# Altium PCB Light Control.PcbDoc
Units mm, origin at the board's own origin, x right, y up, seen from the top; angles counter-clockwise.
Board outline 152.4 x 101.6 mm, 2 copper layers (Top Layer, Bottom Layer); 26 components, 34 nets, 101 pads, 44 vias.
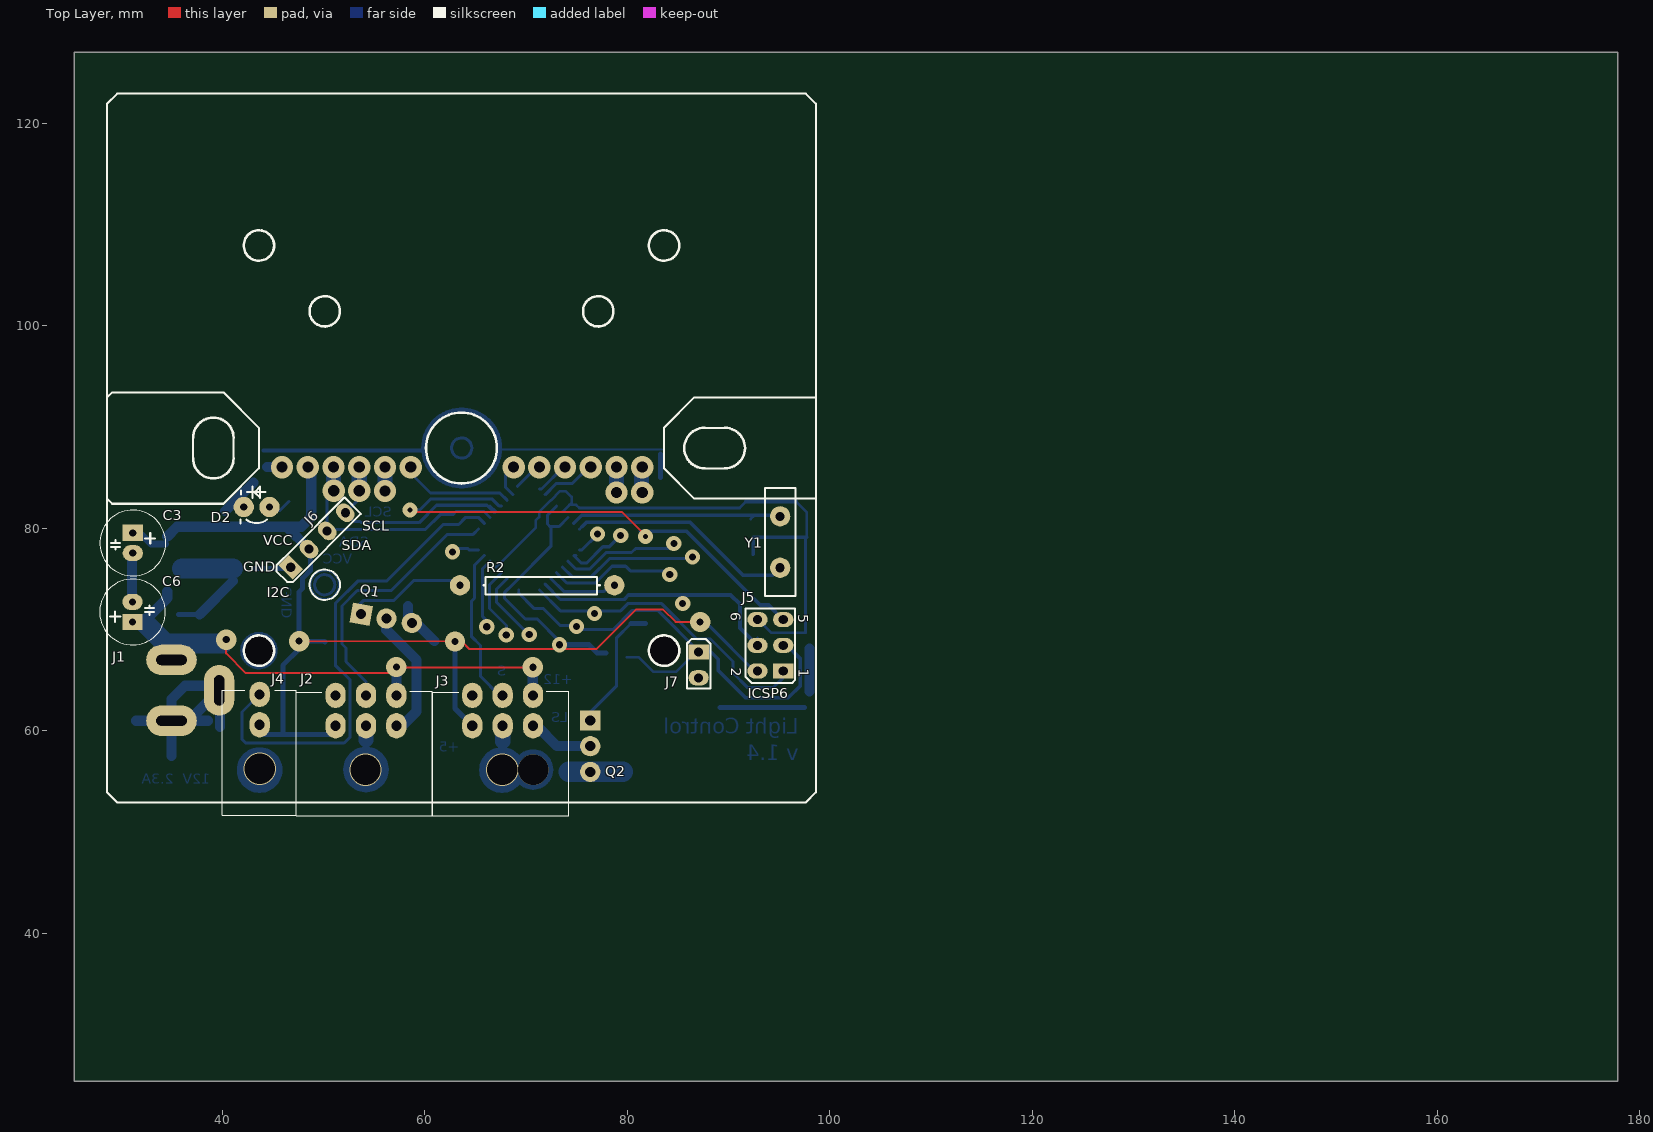
[diagram p0: Top Layer view]
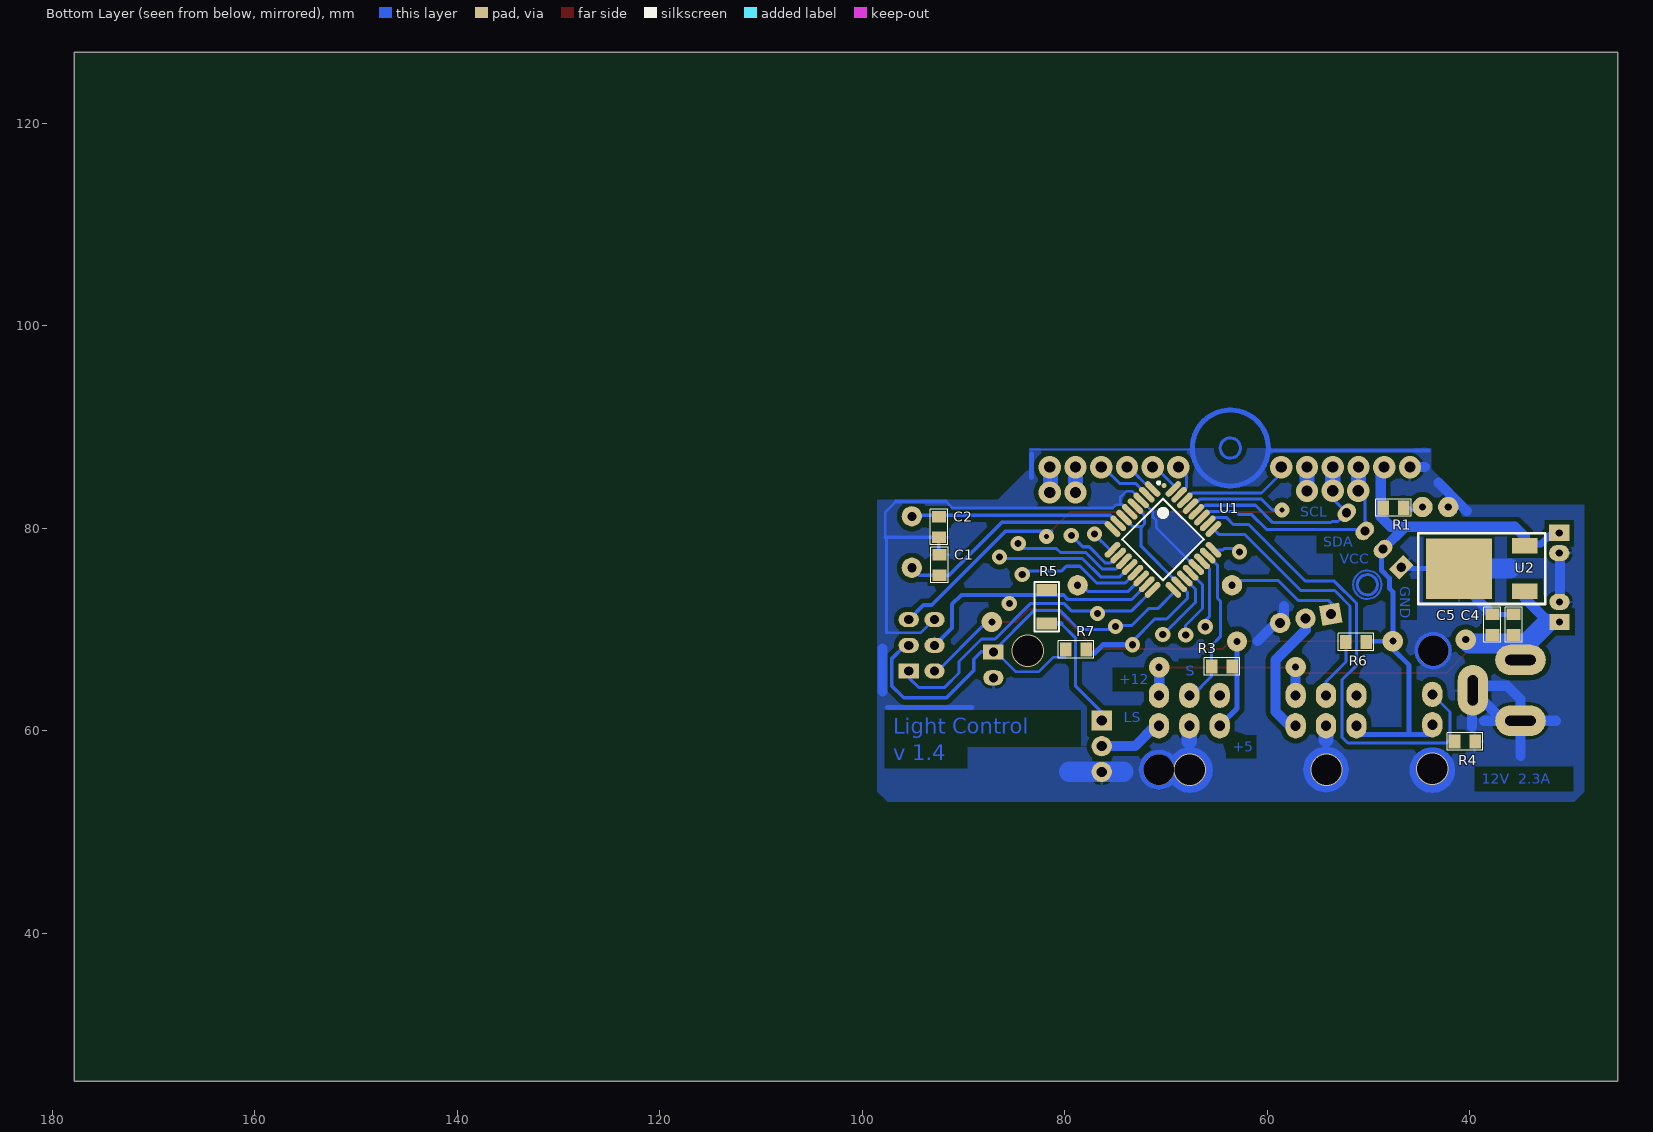
[diagram p1: Bottom Layer view, seen from below]
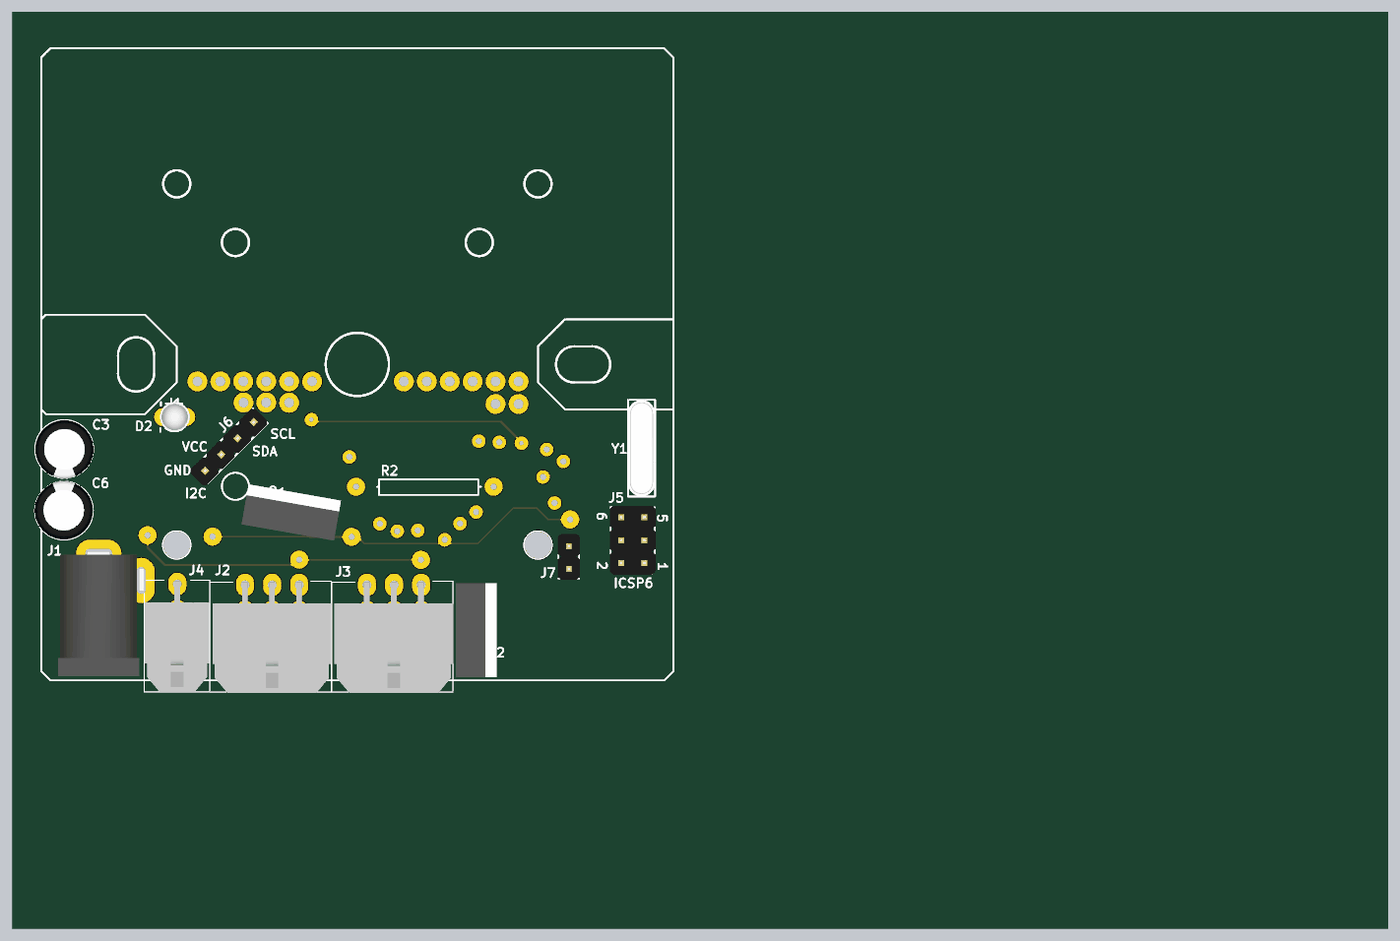
[diagram p2: 3D render of the assembled board from above, using the file's embedded part models]
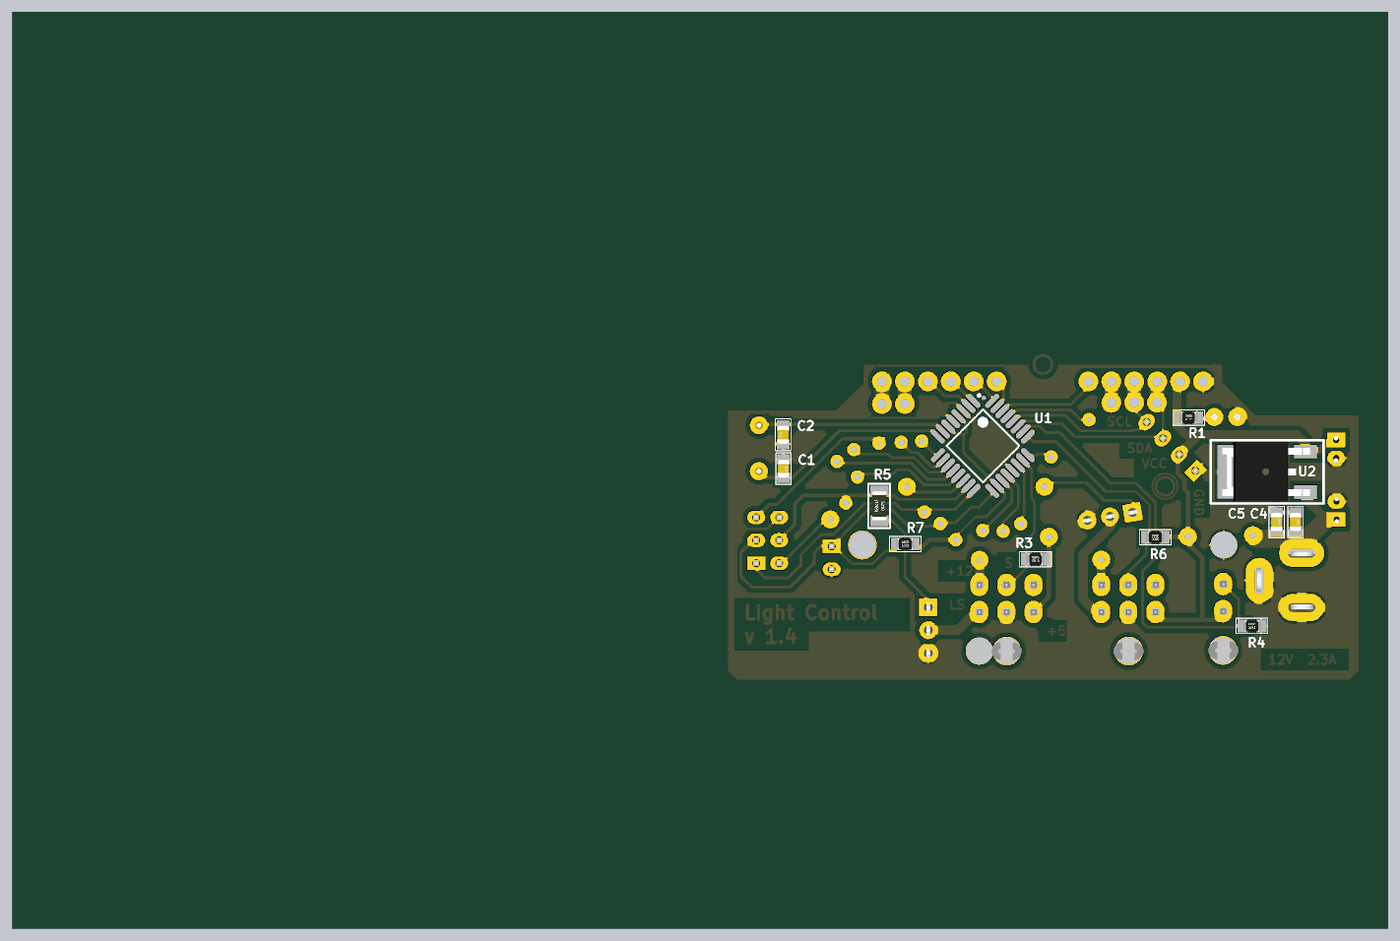
[diagram p3: 3D render of the assembled board from below, using the file's embedded part models]

## Layer stack, top to bottom
Top Solder: solder mask 0.0102, Solder Resist, Dk 3.5
Top Layer: signal copper 0.0356
Dielectric 1: dielectric 0.32, FR-4, Dk 4.8
Bottom Layer: signal copper 0.0356
Bottom Solder: solder mask 0.0102, Solder Resist, Dk 3.5

## Board outline
25.4,25.4 177.8,25.4 177.8,127 25.4,127

## Design rules (kind name [scope] priority, off if disabled: settings)
Clearance PolgonClearence [InPolygon] p1: gap=0.5
Clearance [All] p2: gap=0.2
PlaneClearance [All] p1: clearance=2
PlaneConnect [All] p1: planeconnectstyle=Relief reliefexpansion=0.508 reliefentries=4 reliefconductorwidth=0.5 reliefairgap=1
PolygonConnect [All] p1: connectstyle=Relief reliefconductorwidth=0.254 reliefentries=4 polygonreliefangle="90 Angle" airgapwidth=0.3
RoutingVias [All] p1: holewidth=0.711 width=1.27 viastyle="Through Hole" minholewidth=0.711 minwidth=1.27 maxholewidth=0.711 maxwidth=1.27
SolderMaskExpansion [All] p1: expansion=0.102
Width [All] p1: maxlimit=2 minlimit=0.2 preferedwidth=0.5
27 further rules are at their usual default settings.

## Components (designator, comment, footprint, x,y, rotation, side; value= is the part's Value field where it differs from the comment)
C1 "22pF" "SMD 0805 (2012)" 92.4,77.4 r270 bottom
C2 "22pF" "SMD 0805 (2012)" 92.4,79.1 r90 bottom
C3 "220mF 16v" "Cap E p2mm D6.5xH11" 31.175,79.55 r270 top
C4 "0.01uF" "SMD 0805 (2012)" 35.7,71.5 r270 bottom
C5 "0.1uF" "SMD 0805 (2012)" 37.8,71.5 r270 bottom
C6 "25v 220mF" "Cap E p2mm D6.5xH11" 31.146,70.734 r90 top
D2 "FYL-3014GD" "LED Round 3mm Green" 44.675,82.1 r180 top
J1 "DC In 12V" "DC Connector" 35,67 r270 top
J2 "Connector" "Molex Micro-Fit 3.0 - 6 pin D R" 57.2,60.5 r0 top
J3 "Connector" "Molex Micro-Fit 3.0 - 6 pin D R" 70.7,60.5 r0 top
J4 "Light Sensor" "Molex Micro-Fit 3.0 - 2 pin D R" 43.7,60.6 r0 top
J5 "ISP6" "LINE 2.54 x 6D (2 x 3)" 95.4,65.9 r180 top
J6 "PLS-4" "Line 2.54 X 4" 46.775,76.15 r135 top
J7 "ON/OFF Display and serial" "Line 2.54 x 2" 87.05,67.775 r0 top
Q1 "TIP122" TO220-2 53.725,71.525 r260 top
Q2 "TIP122" TO220-2 76.35,61.025 r180 top
R1 "2.2k Om" "SMD 0805 (2012)" 48.55,82 r180 bottom
R2 "1kOm" "Res 0.25w - 7p" 78.725,74.375 r180 top
R3 "10KOm" "SMD 0805 (2012)" 65.5,66.325 r180 bottom
R4 "Om" "SMD 0805 (2012)" 41.525,58.925 r180 bottom
R5 "1kOm" "SMD 1206 (3216)" 81.775,73.9 r270 bottom
R6 "10KOm" "SMD 0805 (2012)" 50.2,68.8 r0 bottom
R7 "10kOm" "SMD 0805 (2012)" 79.925,68 r180 bottom
U1 "ATmega8A-AU" 32A_M 70.3,78.9 r225 bottom
U2 "7805C" D-PAK 41.075,76.025 r180 bottom
Y1 "12 MHz" "XTAL - 2" 95.1,76.1 r90 top

## Footprints (in the part's own frame and the unit in brackets; to place one, negate y for a bottom-side part, rotate by r counter-clockwise, add the part's x,y. Pads: shape width x height; smd on the part's side, far side on the other; paste and mask are expansions set on the pad)
32A_M [mm] "Thin QFP, 32-Leads, Body 7x7mm, Pitch 0.8mm, IPC Low Density"
  oval 1.95x0.6 smd: 1(-4.25,2.8) 2(-4.25,2) 3(-4.25,1.2) 4(-4.25,0.4) 5(-4.25,-0.4) 6(-4.25,-1.2) 7(-4.25,-2) 8(-4.25,-2.8) 17(4.25,-2.8) 18(4.25,-2) 19(4.25,-1.2) 20(4.25,-0.4) 21(4.25,0.4) 22(4.25,1.2) 23(4.25,2) 24(4.25,2.8)
  oval 0.6x1.95 smd: 9(-2.8,-4.25) 10(-2,-4.25) 11(-1.2,-4.25) 12(-0.4,-4.25) 13(0.4,-4.25) 14(1.2,-4.25) 15(2,-4.25) 16(2.8,-4.25) 25(2.8,4.25) 26(2,4.25) 27(1.2,4.25) 28(0.4,4.25) 29(-0.4,4.25) 30(-1.2,4.25) 31(-2,4.25) 32(-2.8,4.25)
  silkscreen extent -4.37,-2.85 2.85,3.77, body extent -3.5,-3.5 3.5,3.5, height 1.2
"Cap E p2mm D6.5xH11" [mm] "D 6.5mm; H 11mm"
  rect 1.6x2 hole 0.7: 1(0,0)
  oval 1.6x2 hole 0.7: 2(2,0)
  silkscreen extent -2.25,-3.25 4.25,3.25, body extent -2.22,-3.22 4.27,3.28, height 11.49
D-PAK [mm]
  rect 2.54x1.5 smd: 1(6.5,-2.25) 3(6.5,2.25)
  rect 6.48x5.97 smd: 2(0,0)
  silkscreen extent -4,-3.5 8.5,3.5, body extent -2.7,-3.29 7,3.29, height 2.3
"DC Connector" [mm] "Ext Pin D: 5.5mm; Int Pin D: 2.5mm"
  oval 5x3 hole 1 slot 3 at 0 deg: GND(3,4.7)
  oval 3x5 hole 1 slot 3 at 90 deg: GND(6,0) VCC(0,0)
  body extent -0.2,-4.53 13.63,4.98, height 11
"LED Round 3mm Green" [mm]
  round 2 hole 0.7: A(0,0) K(2.54,0)
  silkscreen extent 0.25,-2.03 2.88,1.63, body extent -0.39,-1.65 2.91,1.64, height 5.51
"Line 2.54 x 2" [mm]
  rect 2x1.5 hole 0.9: 1(0,0)
  oval 2x1.5 hole 0.9: 2(0,-2.54)
  silkscreen extent -1.15,-3.57 1.15,1.28, body extent -1.25,-3.69 1.25,1.39, height 8.3
"Line 2.54 X 4" [mm]
  rect 2x1.5 hole 0.9: 1(0,0)
  oval 2x1.5 hole 0.9: 2(0,-2.54) 3(0,-5.08) 4(0,-7.62)
  silkscreen extent -1.18,-8.62 1.12,1.27, body extent -1.25,-8.78 1.25,1.38, height 8.2
"LINE 2.54 x 6D (2 x 3)" [mm]
  rect 2x1.5 hole 0.9: 1(0,0)
  oval 2x1.5 hole 0.9: 2(2.54,0) 3(0,-2.54) 4(2.54,-2.54) 5(0,-5.08) 6(2.54,-5.08)
  silkscreen extent -1.15,-6.2 3.72,1.17, body extent -1.27,-6.36 3.81,1.26, height 8.5
"Molex Micro-Fit 3.0 - 2 pin D R" [mm]
  oval 2x2.5 hole 1: 1(0,0) 2(0,3)
  silkscreen extent -3.67,-8.95 3.6,3.4, body extent -3.6,-8.95 3.55,3.3, height 8.83
"Molex Micro-Fit 3.0 - 6 pin D R" [mm]
  oval 2x2.5 hole 1: 1(0,0) 2(-3,0) 3(-6,0) 4(0,3) 5(-3,3) 6(-6,3)
  silkscreen extent -9.9,-8.87 3.52,3.4, body extent -9.6,-8.94 3.55,3.3, height 8.83
"Res 0.25w - 7p" [mm] "L p7.62; horisontal"
  round 2 hole 0.7: 1(0,0) 2(15.24,0)
  silkscreen extent 1.4,-0.8 12.9,0.9
"SMD 0805 (2012)" [mil]
  rect 45x55 smd: 1(0.35,0.98) 2(80.35,0.98)
  silkscreen extent -29,-32 109,34, body extent 1,-24 80,26, height 31
"SMD 1206 (3216)" [mm]
  rect 1.2x2 smd: 1(0,0) 2(3.3,0)
  silkscreen extent -0.8,-1.2 4.1,1.2, body extent 0.05,-0.8 3.25,0.8, height 0.55
TO220-2 [mm]
  rect 2x2 hole 1: 1(0,0)
  round 2 hole 1: 2(0,2.54) 3(0,5.08)
  body extent -2.7,-2.65 1.8,7.75, height 19
"XTAL - 2" [mm]
  round 2 hole 0.9: 1(0,0) 2(5.08,0)
  silkscreen extent -2.8,-1.5 7.9,1.5, body extent -2.79,-1.52 7.87,1.52, height 3.09

## Part data
C1 C2 C4 C5: library part "Cap SMD 0402-1812", "Capacitor"
C3 C6: library part "Cap E 220mF x 16V", "Capacitor"
D2: library part "Led Round 3mm Green", "2.1v 10mA, 15-30mCd"
J1: library part "DC Connector (PJ-002B)", "DC Connector"
J2 J3: library part "Micro-Fit 6R (2x3)", "Horisontal, Dbl line, Male - 3mm"
J4: library part "Micro-Fit 2R (1x2)", "Horisontal, Dbl line, Male - 3mm"
J5: library part "PLD-6 (2 x 3)", "Vert, Dbl line, Male"
J6: "Vert, Sgl line, Male"
J7: library part PLS-2, "Vert, Sgl line, Male"
Q1 Q2: "NPN Darlington 5A, 65W, 100V, h>1000"
R1 R2 R3 R4 R5 R6 R7: library part "Res All Types"
U1: "8-bit AVR Microcontroller, 8KB Flash, 512 Bytes EEPROM, 1KB SRAM, 32-pin TQFP, Industrial Grade (-40°C to 85°C)"
U2: "Voltage Regulator"
Y1: library part XTAL, "Crystal Oscillator"

## Free pads (board coordinates)
  round 0.5 smd far side: 0(70.2,84.225)

## Via types
v1: diameter 2.2, hole 1.1, Top Layer to Bottom Layer, 17 vias
v2: diameter 1.5, hole 0.7, Top Layer to Bottom Layer, 13 vias
v3: diameter 2, hole 0.7, Top Layer to Bottom Layer, 6 vias
v4: diameter 3.2, hole 3, Top Layer to Bottom Layer, 4 vias
v5: diameter 1.5, hole 0.5, Top Layer to Bottom Layer, 2 vias
v6: diameter 3, hole 3, Top Layer to Bottom Layer, 2 vias

## Nets (pads, with @x,y where several pads share a name; then routed paths per layer and width w, separated by ;. In a path a pad name is that pad's centre, name@x,y a point inside that pad or via, vN(x,y) a via of type N, cw(c..) or ccw(c..) an arc to the next point about the centre after c; other vN are vias at no path point)
+5V: C3.1 J2.3 J3.3 J4.1 J5.2 J6.2 R1.1 R3.2 R6.1 R7.2 U1.4 U1.6 U1.18 U2.3 | length 142.9
  Top Layer w0.2: v3(47.6,68.85) v3(63,68.825) 63.675,68.825 64.425,68.075 76.95,68.075 80.875,72 83.525,72 84.775,70.75 v3(87.2,70.75) 87.662,70.75 87.9,70.513 v3@87.9,70.425
  Bottom Layer w0.254: v3@87.038,70.312 88.138,70.312 ; v3(87.2,70.75) 87.662,70.75 87.9,70.513 87.9,70.425 v3@87.925,70.4 ; J5.2@92.55,65.9 J5.2 J5.2@92.86,66.16
  Bottom Layer w0.3: 72.375,80.175 73.272,80.175 U1.6 ; U1.4 72.125,81.291 72.125,80.425 72.45,80.1 72.45,78.222 U1.18 67.9,73.672 67.9,73.075 69.937,71.038 71.112,71.038 73.3,68.85 v2(73.3,68.5) ; 88.138,70.312 J5.2@92.55,65.9
  Bottom Layer w0.5: J4.1@43.725,59.65 J2.3@51.225,59.65 ; 45.994,59.8 45.994,66.469 47.6,68.075 v3(47.6,68.85) ; J6.2@49.04,77.575 48.725,77.26 48.725,75.85 47.95,75.075 47.95,74.075 47.6,73.725 v3(47.6,68.85) ; R6.1@50.15,68.775 50.1,68.825 v3(47.6,68.85) ; v3(63,68.825) 63,62.2 J3.3 ; v2(73.3,68.5) 76.225,68.5 77.04,67.685 R7.2@77.891,67.685
  Bottom Layer w0.7: C3.1@31.1,79.35 32.075,79.35 32.975,78.45 U2.3@34.4,78.45
  Bottom Layer w1: 34.575,79.175 35.55,80.15 46.367,80.15 ; v1(48.46,86.04) 48.8,85.7 48.8,81.125 47.825,80.15 46.367,80.15 ; J6.2 46.367,80.15
+12V: C4.2 C5.2 C6.1 J1.VCC J2.4 J3.4 U2.1 | length 55.6
  Top Layer w0.2: v3@40.4,69.775 v3(40.4,69) 40.4,67.65 42.35,65.7 56.6,65.7 v3(57.2,66.3) 57.225,66.275 v3(70.675,66.275)
  Bottom Layer w1: C6.1 32.209,70.734 34.575,73.1 U2.1 ; C6.1@31.85,70.6 32.425,70.6 ; J1.VCC J1.VCC@37.025,67 ; v3@40.025,68.625 v3(40.4,69) ; J2.4 v3(57.2,66.3) ; J3.4@70.675,63.525 v3(70.675,66.275)
  Bottom Layer w2: 32.425,70.6 34.4,68.625 v3@40.025,68.625
ADC6: U1.19 | length 7.4
  Bottom Layer w0.3: U1.19 67.1,74.003 67.1,72.675 69.9,69.875 v2@70.55,69.875
  other v2: 70.325,69.525
ADC7: U1.22 | length 7.7
  Bottom Layer w0.3: v2(66.125,70.275) 66.675,70.275 66.7,70.3 65.725,71.275 65.725,76.022 U1.22
AREF: U1.20 | length 7.4
  Bottom Layer w0.3: U1.20 66.4,74.434 66.4,72.075 68.075,70.4 68.075,70.144 v2@68.594,69.625
  other v2: 68.05,69.45
GND: C1.1 C2.1 C3.2 C4.1 C5.1 C6.2 D2.K J1.GND J2.2 J3.2 J5.6 J6.1 J7.2 Q1.3 Q2.3 R4.2 U1.3 U1.5 U1.21 U2.2 | length 253.3
  Bottom Layer w0.2: 67.5,87.8 83.425,87.8
  Bottom Layer w0.254: U1.21 67.078,76.178 70.95,80.05 70.95,80.75 71.3,81.1 71.3,81.625 U1.3@72.45,82.775 ; J3.2@67.7,60 J3.2 ; U1.3 73.378,83.675 73.925,83.675 74.5,83.1 74.5,82.5 U1.5@74,82 ; U1.5 74.279,82.313 74.954,82.313 75.267,82 91.1,82 91.725,82.625 ; C1.1 C1.1@92.425,77.441 ; J5.6 92.92,70.98 94.2,69.7 97.6,69.7 97.6,79 ; 96.675,82.625 97.709,81.591 97.709,79.109
  Bottom Layer w0.35: C1.1@92.425,77.441 C2.1 97.709,79.109
  Bottom Layer w0.4: 44.075,87.7 59.675,87.7 ; 91.725,82.625 96.675,82.625
  Bottom Layer w0.5: C4.1 C5.1 ; U2.2@43.25,76.025 J6.1@47.125,76.025 ; 83.275,85 83.275,87.35 ; 89.175,62.325 97.475,62.325 ; 45.225,67.925 ccw(c43.625,67.925) 45.225,67.925 ; 67.4,87.925 ccw(c63.65,87.925) 67.4,87.925 ; 72.45,56.175 ccw(c70.7,56.175) 72.45,56.175
  Bottom Layer w1: C6.2@31.1,72.9 C3.2@31.1,77.125 ; 31.5,61 38.6,61 ; 35,57.5 35,63.125 36.325,64.45 40.15,64.45 J1.GND@36.7,61 ; J1.GND@35.2,60.9 35.154,60.854 34.6,60.854 35.3,61.554 J1.GND@35.3,61 ; C5.1 U2.2@41.075,74.791 ; 39.8,60.4 J1.GND@39.8,64.05 ; 40.3,81.7 43.1,84.5 ; 44.41,86.04 v1(45.92,86.04) ; Q1.3@58.355,71.1 58.355,72.325 ; Q1.3@58.73,71.1 60.975,68.855 ; 98,63.9 98,68.1 ; 45.45,56.125 ccw(c43.7,56.125) 45.45,56.125 ; 55.95,56.175 ccw(c54.2,56.175) 55.95,56.175 ; 69.375,56.125 ccw(c67.625,56.125) 69.375,56.125
  Bottom Layer w1.5: 54.2,59.083 J2.2 ; 67.7,58.956 J3.2@67.7,60
  Bottom Layer w2: 36.025,76.025 U2.2 ; 74.2,55.95 79.55,55.95
  other v6: 43.625,67.925
"LED STRIP 1": J2.1 Q1.2 | length 13
  Bottom Layer w1: Q1.2@56.19,71.1 56.19,69.985 59.2,66.975 59.2,61.925 57.775,60.5 J2.1
"LED STRIP 2": J3.1 Q2.2 | length 6.5
  Bottom Layer w1: J3.1 71.05,60.5 73.065,58.485 Q2.2
MISO: J5.1 U1.16 | length 30.4
  Bottom Layer w0.3: U1.16 73.39,71.85 79.35,71.85 80.05,72.55 83.4,72.55 86.875,69.075 88.225,69.075 90.45,66.85 90.45,65.7 91.85,64.3 94.45,64.3 95.4,65.25 J5.1
  other v2: 76.775,71.575
MOSI: J5.4 R5.1 U1.15 | length 25.9
  Bottom Layer w0.3: U1.15 73.397,72.975 79.7,72.975 ; J5.4 J5.4@92.86,69.174
  Bottom Layer w0.35: 79.7,72.975 80.15,73.425
  Bottom Layer w0.4: 80.15,73.425 90.2,73.425 91.125,72.5 91.125,70.175 J5.4
  other v2: 85.475,72.575
NetD2_A: D2.A R1.2 | length 2.4
  Bottom Layer w0.3: D2.A 45.024,81.752 45.686,81.752 R1.2@46.584,82.65
NetQ1_1: Q1.1 R2.2 | length 11.9
  Bottom Layer w0.3: Q1.1@53.275,71.1 53.275,72.2 53.925,72.85 56.925,72.85 58.9,74.825 R2.2@63.01,74.825
NetQ2_1: Q2.1 R5.2 | length 12.6
  Bottom Layer w0.3: Q2.1@76.35,61.825 78.925,64.4 78.925,69.15 80.375,70.6
  Bottom Layer w0.5: Q2.1 Q2.1@76.35,61.825 ; 80.375,70.6 R5.2
PB0: U1.12 | length 14.1
  Bottom Layer w0.3: U1.12 74.566,75.2 76.45,75.2 78.25,77 86.3,77 v2@86.45,77.15
  other v2: 86.45,77.175
PB1: U1.13 | length 12.8
  Bottom Layer w0.3: U1.13 74.034,74.6 76.85,74.6 78.5,76.25 79.85,76.25 80.3,75.8 84.125,75.8 84.275,75.65 84.2,75.575 v2(84.2,75.45)
PB2: R2.1 U1.14 | length 7.4
  Bottom Layer w0.3: U1.14 73.728,73.775 77.725,73.775 R2.1@78.825,74.875
PB6: C2.2 U1.7 Y1.2 | length 21.1
  Bottom Layer w0.254: C2.2@92.184,80.9 C2.2 C2.2@92.464,81.18
  Bottom Layer w0.35: U1.7 75.503,81.275 Y1.2@95.1,81.275
PB7: C1.2 U1.8 Y1.1 | length 22.5
  Bottom Layer w0.254: U1.8 75.51,80.15 U1.8@75.525,80.15
  Bottom Layer w0.35: U1.8@75.525,80.15 75.95,80.575 86.225,80.575 91.425,75.375 94.375,75.375 Y1.1
PC0: J3.5 R3.1 U1.23 | length 15.8
  Bottom Layer w0.3: U1.23 64.925,76.353 64.925,73.1 64.6,72.775 64.6,69.325 65.5,68.425 65.5,65.375 67.375,63.5 J3.5
PC1: U1.24 | length 2.9
  Bottom Layer w0.3: v2(62.75,77.675) 62.75,78 64.25,78 64.375,77.875 U1.24
PC2: J2.5 R6.2 U1.25 | length 26.4
  Bottom Layer w0.3: J2.5 54.2,64.85 52.225,66.825 52.225,68.175 51.825,68.575 51.825,72.325 53.35,73.85 56.7,73.85 62.25,79.4 64.79,79.4 U1.25
PC3: J4.2 R4.1 U1.26 | length 48.5
  Bottom Layer w0.3: J4.2 41.957,61.857 41.957,59.168 42.325,58.8 52.05,58.8 52.634,59.384 52.634,65.016 51.175,66.475 51.175,72.575 53.381,74.781 56.231,74.781 61.825,80.375 63.35,80.375 64.05,81.075 65.297,81.075 U1.26
PC4: J6.3 U1.27 | length 23.7
  Bottom Layer w0.3: v1(51.025,83.7) 50.367,83.042 J6.3 50.525,79.9 60.075,79.9 61.525,81.35 62.8,81.35 63.1,81.65 65.853,81.65 U1.27
  Bottom Layer w1.5: v1@51,83.725 v1(51,86.04)
PC5: J6.4 U1.28 | length 22.1
  Bottom Layer w0.3: v1(53.54,83.7) 53.54,82.915 J6.4 53.026,80.675 53.614,80.675 53.714,80.575 53.925,80.575 53.95,80.55 59.45,80.55 61.175,82.275 66.147,82.275 66.8,81.622 U1.28 U1.28@66.434,82.2
  Bottom Layer w1.5: v1(53.54,83.7) v1(53.54,86.04)
PD0: U1.30 | length 11.2
  Bottom Layer w0.3: v1@58.59,86.01 58.59,85.46 60.575,83.475 67.422,83.475 U1.30
  other v1: 58.62,86.04
PD1: U1.31 | length 3.3
  Bottom Layer w0.3: U1.31 68,84.028 68,85.26 v1(68.78,86.04)
PD2: U1.32 | length 2.9
  Bottom Layer w0.3: U1.32@69.15,84.135 v1@71.195,86.18
  other v1: 71.32,86.04
PD3: U1.1 | length 3.3
  Bottom Layer w0.3: U1.1 71.537,83.885 v1@73.692,86.04
  other v1: 73.86,86.04
PD4: U1.2 | length 5.6
  Bottom Layer w0.3: U1.2 72.972,84.4 74.55,84.4 76.19,86.04 v1(76.4,86.04)
PD5: U1.9 | length 2.4
  Bottom Layer w0.3: U1.9 75.525,77.875 v2(77.075,79.425)
PD6: U1.10 | length 6.3
  Bottom Layer w0.3: U1.10@74.932,77.309 U1.10 75.478,76.55 75.968,76.55 77.593,78.175 78.225,78.175 v2(79.35,79.3)
PD7: U1.11 | length 12.4
  Bottom Layer w0.3: U1.11 74.922,75.975 76.3,75.975 77.925,77.6 80.425,77.6 80.825,78 84.3,78 v2@85.05,78.75
  other v2: 84.6,78.5
RESET: J5.5 U1.29 | length 52.4
  Top Layer w0.2: v5@58.55,81.6 79.5,81.6 81.375,79.725 81.775,79.725 81.8,79.7 v5(81.8,79.2)
  Bottom Layer w0.2: J5.5@94.967,70.98 J5.5
  Bottom Layer w0.3: v5(58.55,81.8) 59.5,81.8 60.575,82.875 66.679,82.875 67.366,82.188 U1.29
  Bottom Layer w0.35: v5@81.3,79.7 85.85,79.7 93.125,72.425 93.955,72.425 J5.5
SCK: J5.3 J7.1 R7.1 U1.17 | length 48.5
  Bottom Layer w0.254: U1.17@69.275,73.6 U1.17 ; v2@74.9,70.4 v2@75.3,70 ; 79.966,67.25 81.15,67.25 82.556,65.844 84.844,65.844 86.775,67.775 J7.1 ; J5.3 J5.3@95.76,68.44
  Bottom Layer w0.3: U1.17@69.275,73.6 70.775,72.1 71.675,72.1 73.375,70.4 v2@74.9,70.4 ; v2@75.3,70 78.6,70 80.5,71.9 83,71.9 J7.1@87.088,67.812
  Bottom Layer w0.35: J7.1@87.088,67.812 88.238,67.812 88.975,67.075 88.975,65.95 91.675,63.25 95.9,63.25 97.1,64.45 97.1,67.1 J5.3@95.76,68.44
  other v2: 75,70.3
pads on no net: J2.6 J3.6
copper on no net: | length 30
  Bottom Layer w0.2: 51.525,74.425 ccw(c50.125,74.425) 51.525,74.425
  Bottom Layer w0.3: 50.75,63.95 51.2,63.5 ; 64.5,63.7 64.7,63.5 ; 51.125,74.425 ccw(c50.125,74.425) 51.125,74.425 ; 64.65,87.925 ccw(c63.65,87.925) 64.65,87.925
  Bottom Layer w0.5: v1@55.98,83.24 v1@56.08,83.34 ; 65.4,63.4 65.4,63.5
  Bottom Layer w1.5: v1(56.08,83.675) v1(56.08,86.04) ; v1(78.94,83.54) v1(78.94,86.04) ; v1@81.4,83.62 v1@81.4,86.225
  other v1: 81.48,83.54 81.48,86.04
  other v4: 54.15,56.175 67.65,56.175 43.7,56.25 83.65,67.925
  other v6: 70.7,56.175

## Polygon pours and split planes (outlines as drawn)
GND on Bottom Layer "Top Layer-No Net" (solid, pour order 4): 43.8,87.9 83.5,87.9 83.5,85.9 86.6,82.8 98.5,82.8 98.5,54 97.5,53 29.7,53 28.7,54 28.7,82.3 40.2,82.3 43.8,85.9 43.8,87.9 44.7,87.9 44.8,88

## Other copper
Bottom Layer:
  pour cut-out: 69.95,82 70.075,82.075 70.175,82.1 70.425,82.1 70.525,82.075 70.625,82.025 70.725,81.95 70.8,81.85 70.85,81.75 70.875,81.675 70.9,81.575 70.9,81.475 70.85,81.275 70.75,81.125 70.65,81.025 70.5,80.95 70.4,80.925 70.2,80.925 70.1,80.95 69.95,81.025 69.825,81.15 69.75,81.275 69.7,81.475 69.725,81.675 69.8,81.85
  text "SCL" at 56.725,81.125 h1
  text "SDA" at 54.475,78.175 h1
  text "VCC" at 52.85,76.475 h1
  text "GND" at 46.875,74.3 h1 r90
  text "S" at 68.075,65.45 h1
  text "+12" at 74.6,64.575 h1
  text "LS" at 74.175,60.85 h1
  text "Light Control" at 96.95,59.725 h1.5
  text "+5" at 63.4,57.925 h1
  text "v 1.4" at 96.95,57.1 h1.5
  text "12V  2.3A" at 38.825,54.75 h1

## Silkscreen, mask and mechanical layers (free items; w line width, h text height)
Top Overlay:
  circle w0.254: c83.631,67.923 r1.5
  circle w0.254: c43.631,67.923 r1.5
  circle w0.254: c43.631,107.923 r1.5
  circle w0.254: c83.631,107.923 r1.5
  circle w0.254: c77.131,101.423 r1.5
  circle w0.254: c50.131,101.423 r1.5
  circle w0.2: c50.131,74.423 r1.5
  circle w0.254: c63.631,87.923 r3.5
  lines w0.2: 28.631,82.923 29.131,82.423 40.131,82.423 43.631,85.923 43.631,87.923 43.631,89.923 40.131,93.423 29.131,93.423 28.631,92.923 ; 37.131,86.923 37.131,88.923 ; 41.131,86.923 41.131,88.923 ; 87.631,85.923 89.631,85.923 ; 87.631,89.923 89.631,89.923 ; 98.631,82.923 86.631,82.923 83.631,85.923 83.631,89.923 86.631,92.923 98.631,92.923 ; 28.631,53.923 29.631,52.923 97.631,52.923 98.631,53.923 98.631,121.923 97.631,122.923 29.631,122.923 28.631,121.923 28.631,53.923
  lines w0.254: 37.131,86.923 ccw(c39.131,86.923) 41.131,86.923 ; 37.131,88.923 cw(c39.131,88.923) 41.131,88.923 ; 87.631,85.923 cw(c87.631,87.923) 87.631,89.923 ; 89.631,85.923 ccw(c89.631,87.923) 89.631,89.923
  text "SCL" at 53.852,79.746 h1
  text "VCC" at 44.075,78.325 h1
  text "SDA" at 51.832,77.827 h1
  text "GND" at 42.075,75.725 h1
  text "I2C" at 44.4,73.175 h1
  text "ICSP6" at 91.875,63.225 h1

## Text inside footprints (layer, text, board x,y; h text height)
J5: Top Overlay "6" at 90.2,71.7 h1 r270; Top Overlay "5" at 96.9,71.5 h1 r270; Top Overlay "2" at 90.25,66.25 h1 r270; Top Overlay "1" at 96.95,66.15 h1 r270